# EAGLE board UltrasonicSensorArray3 (EAGLE 9.5.2)
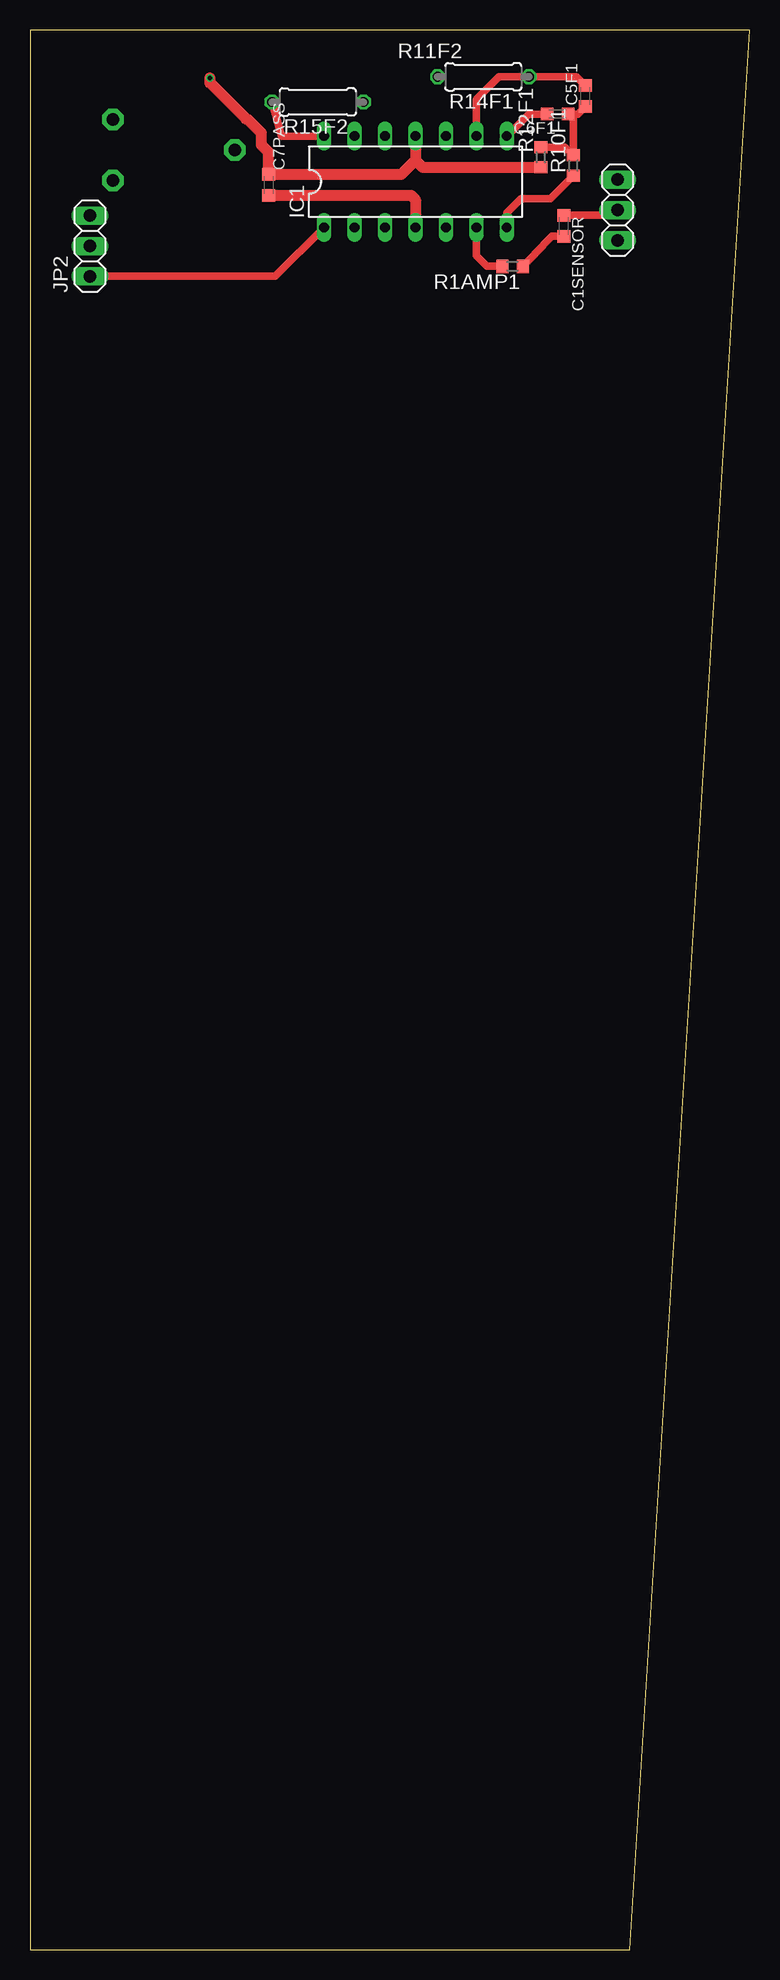
[diagram p0: board, top side]
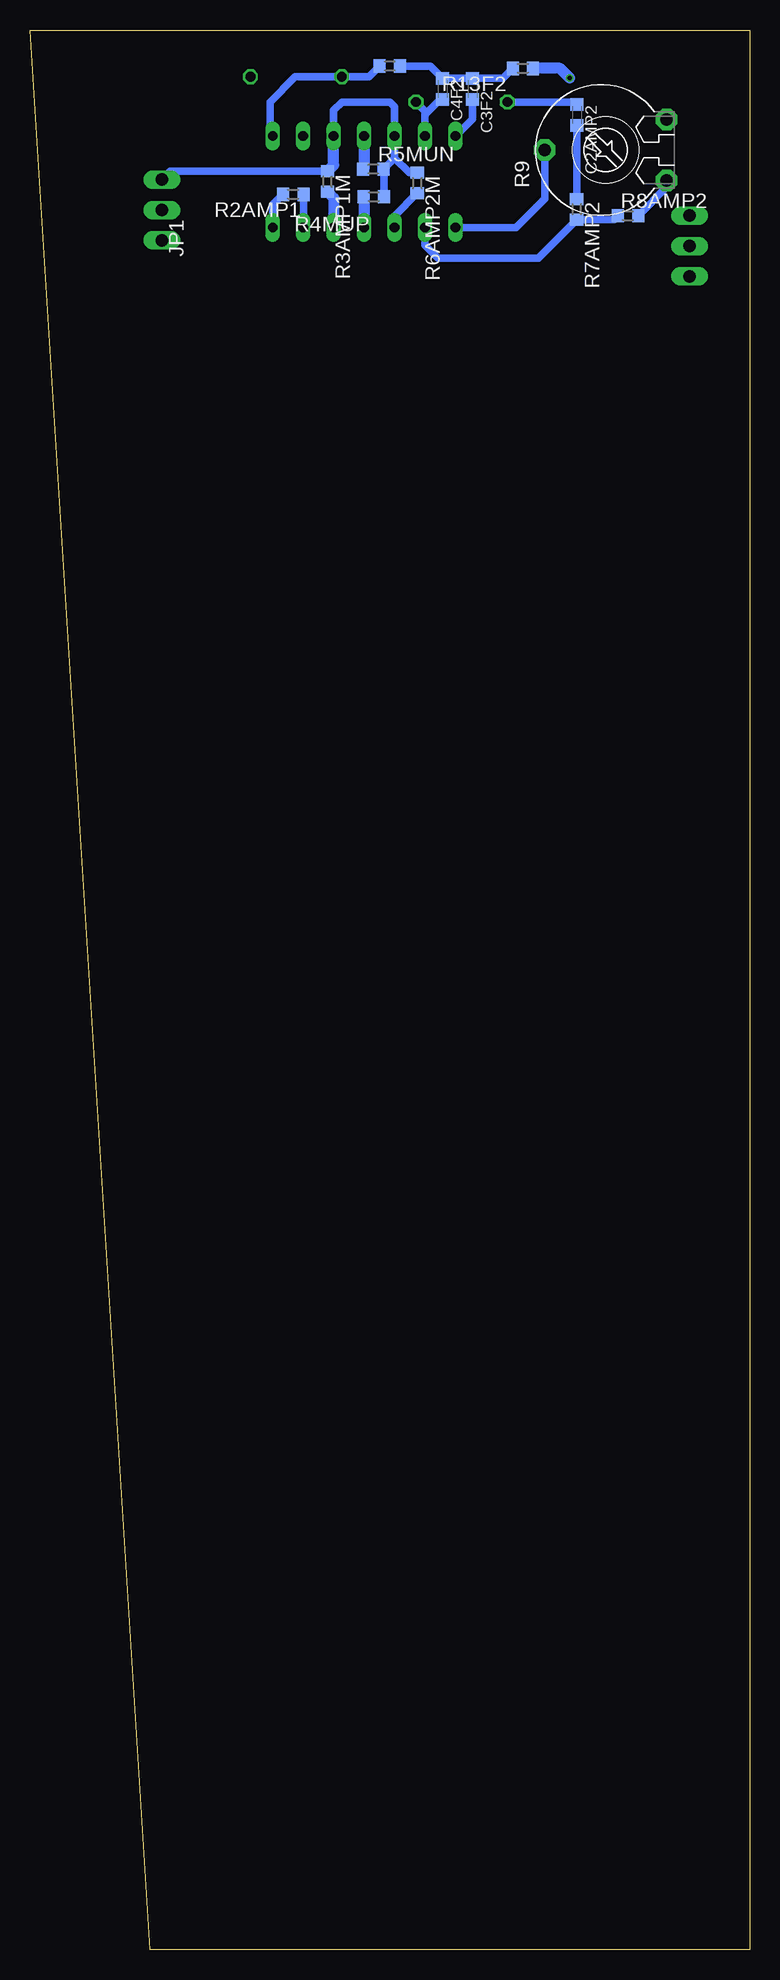
[diagram p1: board, bottom side, seen from below]

Size 60 x 160 mm. Coordinates in mm from the lower left corner, seen from the top.
Outline: 0,0 50,0 60,160 0,160 0,0
Copper layers (1*16): Top 0.035mm / dielectric 1.6mm / Bottom 0.035mm
Design rules "Elecrow_2-layer_PCB_eagle_rule": minimum track width 6mil, minimum drill 12mil, track to track 6mil, track to pad 6mil, pad to pad 6mil, via to via 8mil, smd to smd 0mil, copper to edge 20mil, drill to drill 10mil, minimum pad ring 6mil, minimum via ring 6mil, stop-mask expansion 0mil, vias tented up to drill 100mil, thermal gap 10mil
Net classes: 0 default: width 0.61 mm, clearance 0.203 mm; 1 power: width 0.914 mm, clearance 0.254 mm

## Footprints (pad centres in the part's own frame; a part is rotated, then mirrored left to right if it is on the bottom)
C0603K = smd 1.05 x 1.08: 1 -0.875,0; 2 0.875,0
DIL14 = drill 0.813 long: 1 -7.62,-3.81; 2 -5.08,-3.81; 3 -2.54,-3.81; 4 0,-3.81; 5 2.54,-3.81; 6 5.08,-3.81; 7 7.62,-3.81; 8 7.62,3.81; 9 5.08,3.81; 10 2.54,3.81; 11 0,3.81; 12 -2.54,3.81; 13 -5.08,3.81; 14 -7.62,3.81
1X03 = drill 1.016 long: 1 -2.54,0; 2 0,0; 3 2.54,0
R0603 = smd 1 x 1.1: 1 -0.85,0; 2 0.85,0
PT-10 = drill 1.016 pad 1.778 octagon: 1 -2.54,-5.08; 2 2.54,-5.08; 3 0,5.08
0207/7 = drill 0.813 octagon: 1 -3.81,0; 2 3.81,0

## Placement (x,y rotation side)
C1SENSOR  0.1u  [C0603K]  44.51,143.67 270 top
C2AMP2  0.1u  [C0603K]  14.39,152.92 270 bottom
C3F2  1000p  [C0603K]  23.1,155.1 270 bottom
C4F2  1000p  [C0603K]  25.6,155.1 270 bottom
C5F1  1000p  [C0603K]  46.3,154.5 90 top
C6F1  1000p  [C0603K]  44,153 180 top
C7PASS  0.1u  [C0603K]  19.9,147.1 90 top
IC1  OP400P  [DIL14]  32.14,147.35 0 top
JP1  [1X03]  49,145 90 top
JP2  [1X03]  5,142 90 top
R1AMP1  10k  [R0603]  40.24,140.3 180 top
R2AMP1  1M  [R0603]  38.05,146.3 180 bottom
R3AMP1M  10k  [R0603]  35.2,147.36 270 bottom
R4MUP  10k  [R0603]  31.33,146.1 180 bottom
R5MUN  10k  [R0603]  31.38,148.4 0 bottom
R6AMP2M  10k  [R0603]  27.71,147.24 270 bottom
R7AMP2  10k  [R0603]  14.41,145.05 270 bottom
R8AMP2  10k  [R0603]  10.14,144.51 0 bottom
R9  500k  [PT-10]  12,150 90 bottom
R10F1  15k  [R0603]  45.3,148.7 90 top
R11F2  15k  [R0603]  30,157 0 bottom
R12F1  330  [R0603]  42.6,149.4 90 top
R13F2  330  [R0603]  18.9,156.8 180 bottom
R14F1  39k  [0207/7]  37.8,156.1 180 top
R15F2  47k  [0207/7]  24,154 180 top

## Library data of the parts
C1SENSOR C2AMP2 C3F2 C4F2 C5F1 C6F1 C7PASS = rcl; SPICEPREFIX: C
IC1 = linear
JP1 JP2 = pinhead
R1AMP1 R2AMP1 R3AMP1M R4MUP R5MUN R6AMP2M R7AMP2 R8AMP2 R10F1 R11F2 R12F1 R13F2 R14F1 R15F2 = rcl; SPICEPREFIX: R
R9 = rcl; SPICEMODEL: POT; SPICEPREFIX: X

## Nets
AGND [power]: C7PASS.2 IC1.11 R5MUN.1 R12F1.1 R13F2.1
N$1: IC1.6 R1AMP1.2 R2AMP1.1
N$2: IC1.5 R3AMP1M.2
N$3: IC1.7 R2AMP1.2 R10F1.1
N$4: IC1.2 R7AMP2.2 R8AMP2.1
N$5: IC1.10 IC1.12 JP1.3 R3AMP1M.1 R4MUP.1 R5MUN.2 R6AMP2M.1
N$6: C1SENSOR.1 JP1.2
N$7: IC1.3 R6AMP2M.2
N$8: C1SENSOR.2 R1AMP1.1
N$9: C2AMP2.2 R7AMP2.1
N$10: R8AMP2.2 R9.1
N$11: IC1.1 JP2.1 R9.3
N$12: C2AMP2.1 C3F2.2 IC1.14 R15F2.2
N$13: C5F1.2 IC1.9 R14F1.1
N$14: C4F2.2 IC1.13 R15F2.1
N$15: C3F2.1 C4F2.1 R11F2.2 R13F2.2
N$16: C6F1.2 IC1.8 R11F2.1 R14F1.2
N$17: C5F1.1 C6F1.1 R10F1.2 R12F1.2
VCC [power]: C7PASS.1 IC1.4 R4MUP.2

## Tracks (layer width: path | path; a pad name or v marks a point on that pad's centre or on a via)
AGND  (via drill 0.35)
  Top 0.914: 32.14,149.14 30.98,147.97 C7PASS.2 19.9,149.8 19.3,150.4 19.3,151.4 18.1,152.6 18,152.6 15,155.6 v15,156 | IC1.11 32.14,149.14 | 32.14,149.14 32.73,148.55 R12F1.1
  Bottom 0.914: IC1.11 32.14,148.49 R5MUN.1 | v15,156 15.8,156.8 R13F2.1
N$1
  Top 0.61: IC1.6 37.22,141.18 38.1,140.3 R1AMP1.2
  Bottom 0.61: IC1.6 37.2,143.56 R2AMP1.1
N$2
  Bottom 0.914: R3AMP1M.2 34.68,145.99 IC1.5
N$3
  Top 0.61: IC1.7 39.76,144.76 40.95,145.95 43.4,145.95 R10F1.1
  Bottom 0.61: R2AMP1.2 39.76,145.44 IC1.7
N$4
  Bottom 0.61: R8AMP2.1 11.3,144.2 R7AMP2.2 17.61,141 26,141 27.06,142.06 IC1.2
N$5
  Bottom 0.61: 29.6,149.33 R5MUN.2 30.48,148.35 R4MUP.1 | 29.6,149.33 IC1.12 29.6,153.6 30,154 34,154 34.68,153.32 IC1.10 | R6AMP2M.1 28.36,148.09 29.6,149.33 | JP1.3 48.33,148.21 R3AMP1M.1
  Bottom 0.914: R3AMP1M.1 34.68,148.73 IC1.10
N$6
  Top 0.61: JP1.2 48.55,144.54 C1SENSOR.1
N$7
  Bottom 0.61: R6AMP2M.2 29.6,144.5 IC1.3
N$8
  Top 0.61: C1SENSOR.2 43.51,142.79 42.09,141.38 42.09,141.3 R1AMP1.1
N$9
  Bottom 0.61: C2AMP2.2 14.39,145.92 R7AMP2.1
N$10
  Bottom 0.61: R9.1 6.92,146.88 R8AMP2.2
N$11
  Top 0.61: JP2.1 20.44,139.46 IC1.1
  Bottom 0.61: R9.3 17.08,145.92 19.46,143.54 IC1.1
N$12
  Top 0.61: R15F2.2 20.97,151.16 IC1.14
  Bottom 0.61: C3F2.2 23.1,152.58 IC1.14 | C2AMP2.1 14.6,154 R15F2.2
N$13
  Top 0.61: C5F1.2 45.58,156.1 R14F1.1 39.1,156.1 37.22,154.22 IC1.9
N$14
  Bottom 0.61: C4F2.2 25.77,154.22 27.06,152.94 IC1.13 27.06,153.25 R15F2.1
N$15
  Bottom 0.61: R11F2.2 26.62,157 C4F2.1 C3F2.1 20.57,155.97 R13F2.2
N$16
  Top 0.61: C6F1.2 41.6,153 IC1.8
  Bottom 0.61: IC1.8 40,151.4 40,154 37.9,156.1 R14F1.2 31.75,156.1 R11F2.1
N$17
  Top 0.61: C5F1.1 45.67,153 C6F1.1 45.3,152.57 R10F1.2 44.6,150.25 R12F1.2
VCC
  Top 0.914: C7PASS.1 31.77,146.22 32.14,145.86 IC1.4
  Bottom 0.914: R4MUP.2 32.14,146.06 IC1.4